# EAGLE board Eagle Board Unrouted (EAGLE 6.4)

Size 100 x 80 mm. Coordinates in mm from the lower left corner, seen from the top.
Outline: 0,0 100,0 100,80 0,80 0,0
Copper layers (1*16): Top 0.035mm / dielectric 1.5mm / Bottom 0.035mm
Design rules "default": minimum track width 10mil, minimum drill 24mil, track to track 8mil, track to pad 8mil, pad to pad 8mil, via to via 8mil, smd to smd 8mil, copper to edge 40mil, drill to drill 8mil, minimum pad ring 10mil, minimum via ring 8mil, stop-mask expansion 4mil, vias tented up to drill 0mil, thermal gap 10mil
Net classes: 1 vcc: width 0.254 mm

## Footprints (pad centres in the part's own frame; a part is rotated, then mirrored left to right if it is on the bottom)
1X08 = drill 1.016 pad 1.88 square: 1 0,0 | drill 1.016 pad 1.88: 2 0,-2.54; 3 0,-5.08; 4 0,-7.62; 5 0,-10.16; 6 0,-12.7; 7 0,-15.24; 8 0,-17.78
BATTCON_12MM = smd 3.962 x 3.962: GND 0,0 | smd 3.175 x 3.175: PWR@1 -7.874,0; PWR@2 7.874,0
JST-2-PTH = drill 0.7 pad 1.448: 1 -1,0; 2 1,0
CAP-PTH-SMALL = drill 0.7 pad 1.651: 1 0,0; 2 2.54,0
JOYSTICK = drill 0.9 pad 1.778: B1A -3.175,12.7; B1B 3.175,12.7; B2A -3.175,7.62; B2B 3.175,7.62 | drill 0.889 pad 1.778: H1 -2.54,-10.16; H2 0,-10.16; H3 2.54,-10.16; V1 -10.16,2.54; V2 -10.16,0; V3 -10.16,-2.54 | drill 1.397 pad 2.286: MOUNT1 -7.62,6.668; MOUNT2 -7.62,-6.668; MOUNT3 7.62,-6.668; MOUNT4 7.62,6.668
FTDI_BASIC = drill 1.016 pad 1.88: CTS 10.16,0; DTR 0,0; GND 12.7,0; RXI 2.54,0; TXO 5.08,0; VCC 7.62,0
LED5MM = drill 0.813 octagon: A -1.27,0; K 1.27,0
DIL18 = drill 0.813 long: 1 -10.16,-3.81; 2 -7.62,-3.81; 3 -5.08,-3.81; 4 -2.54,-3.81; 5 0,-3.81; 6 2.54,-3.81; 7 5.08,-3.81; 8 7.62,-3.81; 9 10.16,-3.81; 10 10.16,3.81; 11 7.62,3.81; 12 5.08,3.81; 13 2.54,3.81; 14 0,3.81; 15 -2.54,3.81; 16 -5.08,3.81; 17 -7.62,3.81; 18 -10.16,3.81
AXIAL-0.4 = drill 0.9 pad 1.88: P$1 -5.08,0; P$2 5.08,0
TACTILE-PTH = drill 1.016 pad 1.88: 1 -3.251,2.261; 2 3.251,2.261; 3 -3.251,-2.261; 4 3.251,-2.261
SO16W = smd 0.6 x 2.2: 1 -4.445,-4.6; 2 -3.175,-4.6; 3 -1.905,-4.6; 4 -0.635,-4.6; 5 0.635,-4.6; 6 1.905,-4.6; 7 3.175,-4.6; 8 4.445,-4.6; 9 4.445,4.6; 10 3.175,4.6; 11 1.905,4.6; 12 0.635,4.6; 13 -0.635,4.6; 14 -1.905,4.6; 15 -3.175,4.6; 16 -4.445,4.6
SJ_2S-NO = smd 0.635 x 1.27: 1 -0.45,0; 2 0.45,0
DIL16 = drill 0.813 long: 1 -8.89,-3.81; 2 -6.35,-3.81; 3 -3.81,-3.81; 4 -1.27,-3.81; 5 1.27,-3.81; 6 3.81,-3.81; 7 6.35,-3.81; 8 8.89,-3.81; 9 8.89,3.81; 10 6.35,3.81; 11 3.81,3.81; 12 1.27,3.81; 13 -1.27,3.81; 14 -3.81,3.81; 15 -6.35,3.81; 16 -8.89,3.81
ARDUINOFIO = drill 1.016 pad 1.88: 1 -11.43,-16.51; 2 -11.43,-13.97; 3 -11.43,-11.43; 4 -11.43,-8.89; 5 -11.43,-6.35; 6 -11.43,-3.81; 7 -11.43,-1.27; 8 -11.43,1.27; 9 -11.43,3.81; 10 -11.43,6.35; 11 -11.43,8.89; 12 -11.43,11.43; 13 -11.43,13.97; 14 -11.43,16.51; 15 11.43,-16.51; 16 11.43,-13.97; 17 11.43,-11.43; 18 11.43,-8.89; 19 11.43,-6.35; 20 11.43,-3.81; 21 11.43,-1.27; 22 11.43,1.27; 23 11.43,3.81; 24 11.43,6.35; 25 11.43,8.89; 26 11.43,11.43; 27 11.43,13.97; 28 11.43,16.51; 29 -3.81,21.59; 30 -3.81,24.13; 31 3.175,21.59; 32 3.175,24.13; 33 -2.54,35.56; 34 -5.08,35.56; 35 6.35,35.56; 36 3.81,35.56
TFT2.8BREAKOUT = drill 1.016 pad 1.88 square: 1 -38.1,-24.13 | drill 1.016 pad 1.88: 2 -38.1,-21.59; 3 -38.1,-19.05; 4 -38.1,-16.51; 5 -38.1,-13.97; 6 -38.1,-11.43; 7 -38.1,-8.89; 8 -38.1,-6.35; 9 -38.1,-3.81; 10 -38.1,-1.27; 11 -38.1,1.27; 12 -38.1,3.81; 13 -38.1,6.35; 14 -38.1,8.89; 15 -38.1,11.43; 16 -38.1,13.97; 17 -38.1,16.51; 18 -38.1,19.05; 19 -38.1,21.59; 20 -38.1,24.13; 21 35.56,-11.43; 22 35.56,-8.89; 23 35.56,-6.35; 24 35.56,-3.81; 25 35.56,-1.27; 26 35.56,1.27; 27 35.56,3.81; 28 35.56,6.35; 29 35.56,8.89; 30 35.56,11.43; 31 38.1,-11.43; 32 38.1,-8.89; 33 38.1,-6.35; 34 38.1,-3.81; 35 38.1,-1.27; 36 38.1,1.27; 37 38.1,3.81; 38 38.1,6.35; 39 38.1,8.89; 40 38.1,11.43 | hole 3.2: -37.465,-28.575; 37.465,-28.575; 37.465,28.575; -37.465,28.575
RIGHTANGLE_DPDT_PTH = drill 1.016 pad 1.88: 1 -2.54,1.27; 2 0,1.27; 3 2.54,1.27; 4 -2.54,-1.27; 5 0,-1.27; 6 2.54,-1.27
MICROSD_BREAKOUT = drill 1.016 pad 1.88: 1 8.89,7.62; 2 8.89,5.08; 3 8.89,2.54; 4 8.89,0; 5 8.89,-2.54; 6 8.89,-5.08; 7 8.89,-7.62
USB-MINIB = smd 2.5 x 0.5: D+ 2.5,0; D- 2.5,0.8; GND 2.5,-1.6; ID 2.5,-0.8; VBUS 2.5,1.6 | smd 2.5 x 2: MTN1 -3,4.5; MTN2 2.5,4.5; MTN3 -3,-4.5; MTN4 2.5,-4.5 | hole 0.9: 0,2.2; 0,-2.2

## Placement (x,y rotation side)
ACCEL1  ADXL345_BREAKOUT  [1X08]  -166.37,21.59 0 top  (outside the outline)
BAT1  [BATTCON_12MM]  -90.17,133.35 0 top  (outside the outline)
BAT_CONNECT  M02JST-PTH-2  [JST-2-PTH]  -116.84,156.21 0 top  (outside the outline)
C4  0.1µF  [CAP-PTH-SMALL]  -86.36,176.53 0 top  (outside the outline)
C5  0.1µF  [CAP-PTH-SMALL]  -91.44,176.53 0 top  (outside the outline)
JOYSTICK1  JOYSTICKPTH  [JOYSTICK]  -106.68,80.01 0 top  (outside the outline)
JOYSTICK2  JOYSTICKPTH  [JOYSTICK]  -26.67,139.7 0 top  (outside the outline)
JP1  FTDI_BASICPTH  [FTDI_BASIC]  -90.17,157.48 0 top  (outside the outline)
LIGHT_SENSOR  [LED5MM]  -41.91,170.18 0 top  (outside the outline)
MATH  UM-FPU_V3_1DIP  [DIL18]  -25.4,160.02 0 top  (outside the outline)
R1  120k  [AXIAL-0.4]  -52.07,167.64 0 top  (outside the outline)
R2  10k  [AXIAL-0.4]  -64.77,167.64 0 top  (outside the outline)
R3  0  [AXIAL-0.4]  -77.47,167.64 0 top  (outside the outline)
R4  1.8k  [AXIAL-0.4]  -90.17,167.64 0 top  (outside the outline)
R5  1.8k  [AXIAL-0.4]  -102.87,167.64 0 top  (outside the outline)
R6  1k  [AXIAL-0.4]  -115.57,167.64 0 top  (outside the outline)
R7  1k  [AXIAL-0.4]  -19.05,176.53 0 top  (outside the outline)
R8  10k  [AXIAL-0.4]  -31.75,176.53 0 top  (outside the outline)
R9  0  [AXIAL-0.4]  -44.45,176.53 0 top  (outside the outline)
R10  10k  [AXIAL-0.4]  -57.15,176.53 0 top  (outside the outline)
R11  10k  [AXIAL-0.4]  -69.85,176.53 0 top  (outside the outline)
RST_SW  SWITCH-MOMENTARY-2PTH  [TACTILE-PTH]  -109.22,157.48 0 top  (outside the outline)
RST_SW1  SWITCH-MOMENTARY-2PTH  [TACTILE-PTH]  -99.06,157.48 0 top  (outside the outline)
RTC  DS3231/SO  [SO16W]  -106.68,133.35 0 top  (outside the outline)
SJ1  SOLDERJUMPERNO  [SJ_2S-NO]  -81.28,176.53 0 top  (outside the outline)
SPI_ADC  MCP3008  [DIL16]  -50.8,160.02 0 top  (outside the outline)
U$1  ARDUINOFIO  [ARDUINOFIO]  -135.89,19.05 0 top  (outside the outline)
U$2  TFT2.8BREAKOUT  [TFT2.8BREAKOUT]  -127,-54.61 0 top  (outside the outline)
U$3  RIGHTANGLE_DPDT_PTH  [RIGHTANGLE_DPDT_PTH]  -19.05,171.45 0 top  (outside the outline)
U$4  MICROSD_BREAKOUT  [MICROSD_BREAKOUT]  -156.21,-11.43 0 top  (outside the outline)
USB_CHARGE  USB-MINIB-5PIN  [USB-MINIB]  -67.31,160.02 0 top  (outside the outline)

## Library data of the parts
ACCEL1 U$1-U$4 = Custom Library
BAT1 JOYSTICK1 JOYSTICK2 RST_SW RST_SW1 = SparkFun-Electromechanical
BAT_CONNECT JP1 USB_CHARGE = SparkFun-Connectors
C4 C5 = SparkFun-Capacitors
LIGHT_SENSOR = led
MATH = Micromega
R1-R11 = SparkFun-Resistors
RTC SPI_ADC = adafruit
SJ1 = SparkFun-Passives

## Nets
ADC_CS: SPI_ADC.10 U$1.16
BAT+: BAT_CONNECT.2 R6.P$2 U$1.35
CH+: U$1.33 USB_CHARGE.VBUS
FPU_CS: MATH.4 U$1.15
GND [vcc]: ACCEL1.1 BAT1.GND BAT_CONNECT.1 C4.2 C5.2 JOYSTICK1.H3 JOYSTICK1.V3 JOYSTICK2.H3 JOYSTICK2.V3 JP1.GND MATH.13 MATH.17 R1.P$1 R7.P$2 R8.P$1 R9.P$1 R10.P$1 RST_SW1.3 RST_SW.1 RTC.9 RTC.10 RTC.11 RTC.12 RTC.13 SPI_ADC.9 SPI_ADC.14 U$1.13 U$1.28 U$1.34 U$1.36 U$2.1 U$2.21 U$4.3 USB_CHARGE.GND
N$1: JOYSTICK1.B2A R10.P$2 SPI_ADC.5
N$2: JOYSTICK2.B2A R8.P$2 SPI_ADC.6
N$3: LIGHT_SENSOR.K R1.P$2 SPI_ADC.7
N$5: U$1.31 U$3.5
N$8: U$1.32 U$3.4
N$9: RST_SW1.1 RTC.4 SJ1.2
N$11: R3.P$1 R9.P$2 U$2.8 U$2.34
N$12: R6.P$1 R7.P$1 SPI_ADC.8
N$13: BAT1.PWR@1 RTC.14
N$15: R2.P$1 RTC.3
N$16: R11.P$1 RTC.1
N$18: R2.P$2 R11.P$2
N$23: JOYSTICK1.V2 SPI_ADC.1
N$24: JOYSTICK1.H2 SPI_ADC.2
N$25: JOYSTICK2.V2 SPI_ADC.3
N$26: JOYSTICK2.H2 SPI_ADC.4
N$37: RTC.5 RTC.6 RTC.7 RTC.8
SCL: ACCEL1.8 R5.P$1 RTC.16 U$1.17
SD_CS: U$1.4 U$4.7
SDA: ACCEL1.7 R4.P$1 RTC.15 U$1.18
SPI_MISO: MATH.11 SPI_ADC.12 U$1.2 U$4.2
SPI_MOSI: MATH.12 SPI_ADC.11 U$1.3 U$4.6
SPI_SCLK: MATH.16 SPI_ADC.13 U$1.1 U$4.4
VCC: ACCEL1.2 C4.1 C5.1 JOYSTICK1.B1A JOYSTICK1.H1 JOYSTICK1.V1 JOYSTICK2.B1A JOYSTICK2.H1 JOYSTICK2.V1 JP1.VCC LIGHT_SENSOR.A MATH.1 MATH.14 MATH.18 R3.P$2 R4.P$2 R5.P$2 RTC.2 SPI_ADC.15 SPI_ADC.16 U$1.14 U$1.26 U$1.27 U$2.2 U$2.31 U$4.5
µC_A0: U$1.22 U$2.6 U$2.33
µC_A1: U$1.21 U$2.5 U$2.23
µC_A2: U$1.20 U$2.4 U$2.11 U$2.26 U$2.32
µC_A3: U$1.19 U$2.3 U$2.10 U$2.22 U$2.35
µC_CTS: JP1.CTS U$1.30
µC_D2: U$1.12 U$2.15 U$2.28
µC_D3: U$1.11 U$2.16 U$2.38
µC_D4: U$1.10 U$2.17 U$2.29
µC_D5: U$1.9 U$2.18 U$2.39
µC_D6: U$1.8 U$2.19 U$2.30
µC_D7: U$1.7 U$2.20 U$2.40
µC_D8: U$1.6 U$2.9 U$2.13 U$2.25 U$2.27
µC_D9: U$1.5 U$2.12 U$2.14 U$2.36 U$2.37
µC_RST: JP1.DTR RST_SW.3 SJ1.1 U$1.23 U$1.29 U$2.7 U$2.24
µC_RX: JP1.TXO U$1.25
µC_TX: JP1.RXI U$1.24

## Tracks (layer width: path | path; a pad name or v marks a point on that pad's centre or on a via)
ADC_CS  (1 unrouted)
BAT+  (2 unrouted)
CH+  (1 unrouted)
FPU_CS  (1 unrouted)
GND  (33 unrouted)
N$1  (2 unrouted)
N$2  (2 unrouted)
N$3  (2 unrouted)
N$5  (1 unrouted)
N$8  (1 unrouted)
N$9  (2 unrouted)
N$11  (3 unrouted)
N$12  (2 unrouted)
N$13  (1 unrouted)
N$15  (1 unrouted)
N$16  (1 unrouted)
N$18  (1 unrouted)
N$23  (1 unrouted)
N$24  (1 unrouted)
N$25  (1 unrouted)
N$26  (1 unrouted)
N$37  (3 unrouted)
SCL  (3 unrouted)
SD_CS  (1 unrouted)
SDA  (3 unrouted)
SPI_MISO  (3 unrouted)
SPI_MOSI  (3 unrouted)
SPI_SCLK  (3 unrouted)
VCC  (25 unrouted)
µC_A0  (2 unrouted)
µC_A1  (2 unrouted)
µC_A2  (4 unrouted)
µC_A3  (4 unrouted)
µC_CTS  (1 unrouted)
µC_D2  (2 unrouted)
µC_D3  (2 unrouted)
µC_D4  (2 unrouted)
µC_D5  (2 unrouted)
µC_D6  (2 unrouted)
µC_D7  (2 unrouted)
µC_D8  (4 unrouted)
µC_D9  (4 unrouted)
µC_RST  (6 unrouted)
µC_RX  (1 unrouted)
µC_TX  (1 unrouted)